# EAGLE board v1 (EAGLE 8.2.1)

No outline drawn. Coordinates in mm, seen from the top.
Copper layers (1*16): Top 0.035mm / dielectric 1.5mm / Bottom 0.035mm
Design rules "default": minimum track width 6mil, minimum drill 0.35mm, track to track 6mil, track to pad 6mil, pad to pad 6mil, via to via 6mil, smd to smd 6mil, copper to edge 40mil, drill to drill 6mil, minimum pad ring 10mil, minimum via ring 8mil, stop-mask expansion 4mil, vias tented up to drill 0mil, thermal gap 10mil
Holes 2.75 mm at 15.88,49.53 74.15,49.53 16.24,0.76 74.15,0.76

## Footprints (pad centres in the part's own frame; a part is rotated, then mirrored left to right if it is on the bottom)
H2X4-2.54 = drill 0.889 pad 1.651 square: 1 -1.27,3.81 | drill 0.889 pad 1.651: 2 -1.27,1.27; 3 -1.27,-1.27; 4 -1.27,-3.81; 5 1.27,-3.81; 6 1.27,-1.27; 7 1.27,1.27; 8 1.27,3.81

## Placement (x,y rotation side)
E$1  [H2X4-2.54]  65.41,49.53 90 top
E$2  [H2X4-2.54]  45.18,49.53 90 top
E$3  [H2X4-2.54]  55.34,49.53 90 top
E$4  [H2X4-2.54]  35.11,49.53 270 top
E$5  [H2X4-2.54]  24.86,49.53 90 top

## Library data of the parts
E$1-E$5 = Seeed-Connector -2016

## Tracks (layer width: path | path; a pad name or v marks a point on that pad's centre or on a via)
(copper drawn outside any net)
  shapes: Top area x2